# Altium PCB PCB.PcbDoc
Units mm, origin at the board's own origin, x right, y up, seen from the top; angles counter-clockwise.
Board outline 66 x 57 mm, 2 copper layers (Top Layer, Bottom Layer); 12 components, 12 nets, 64 pads, 4 vias.
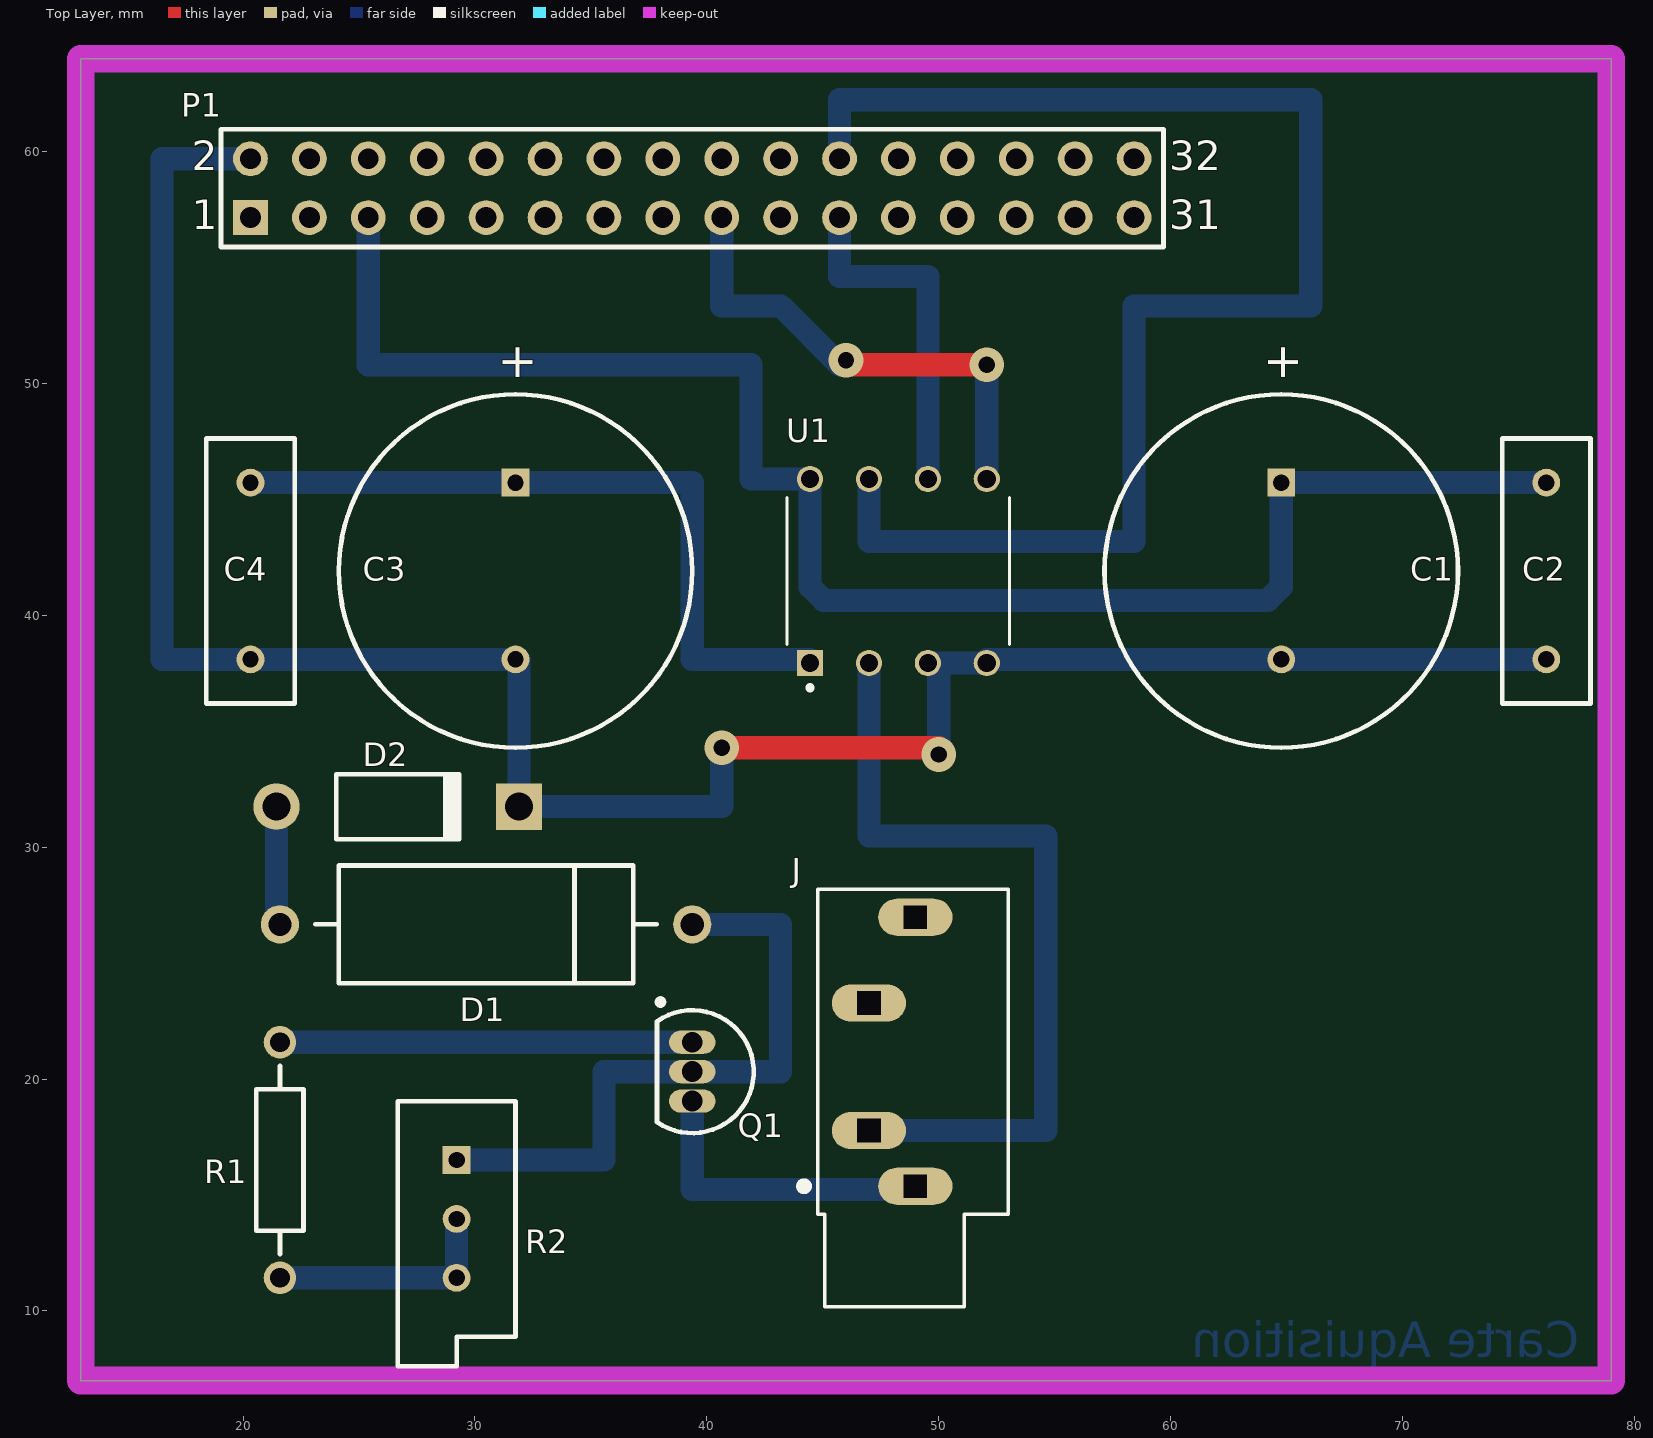
[diagram p0: Top Layer view]
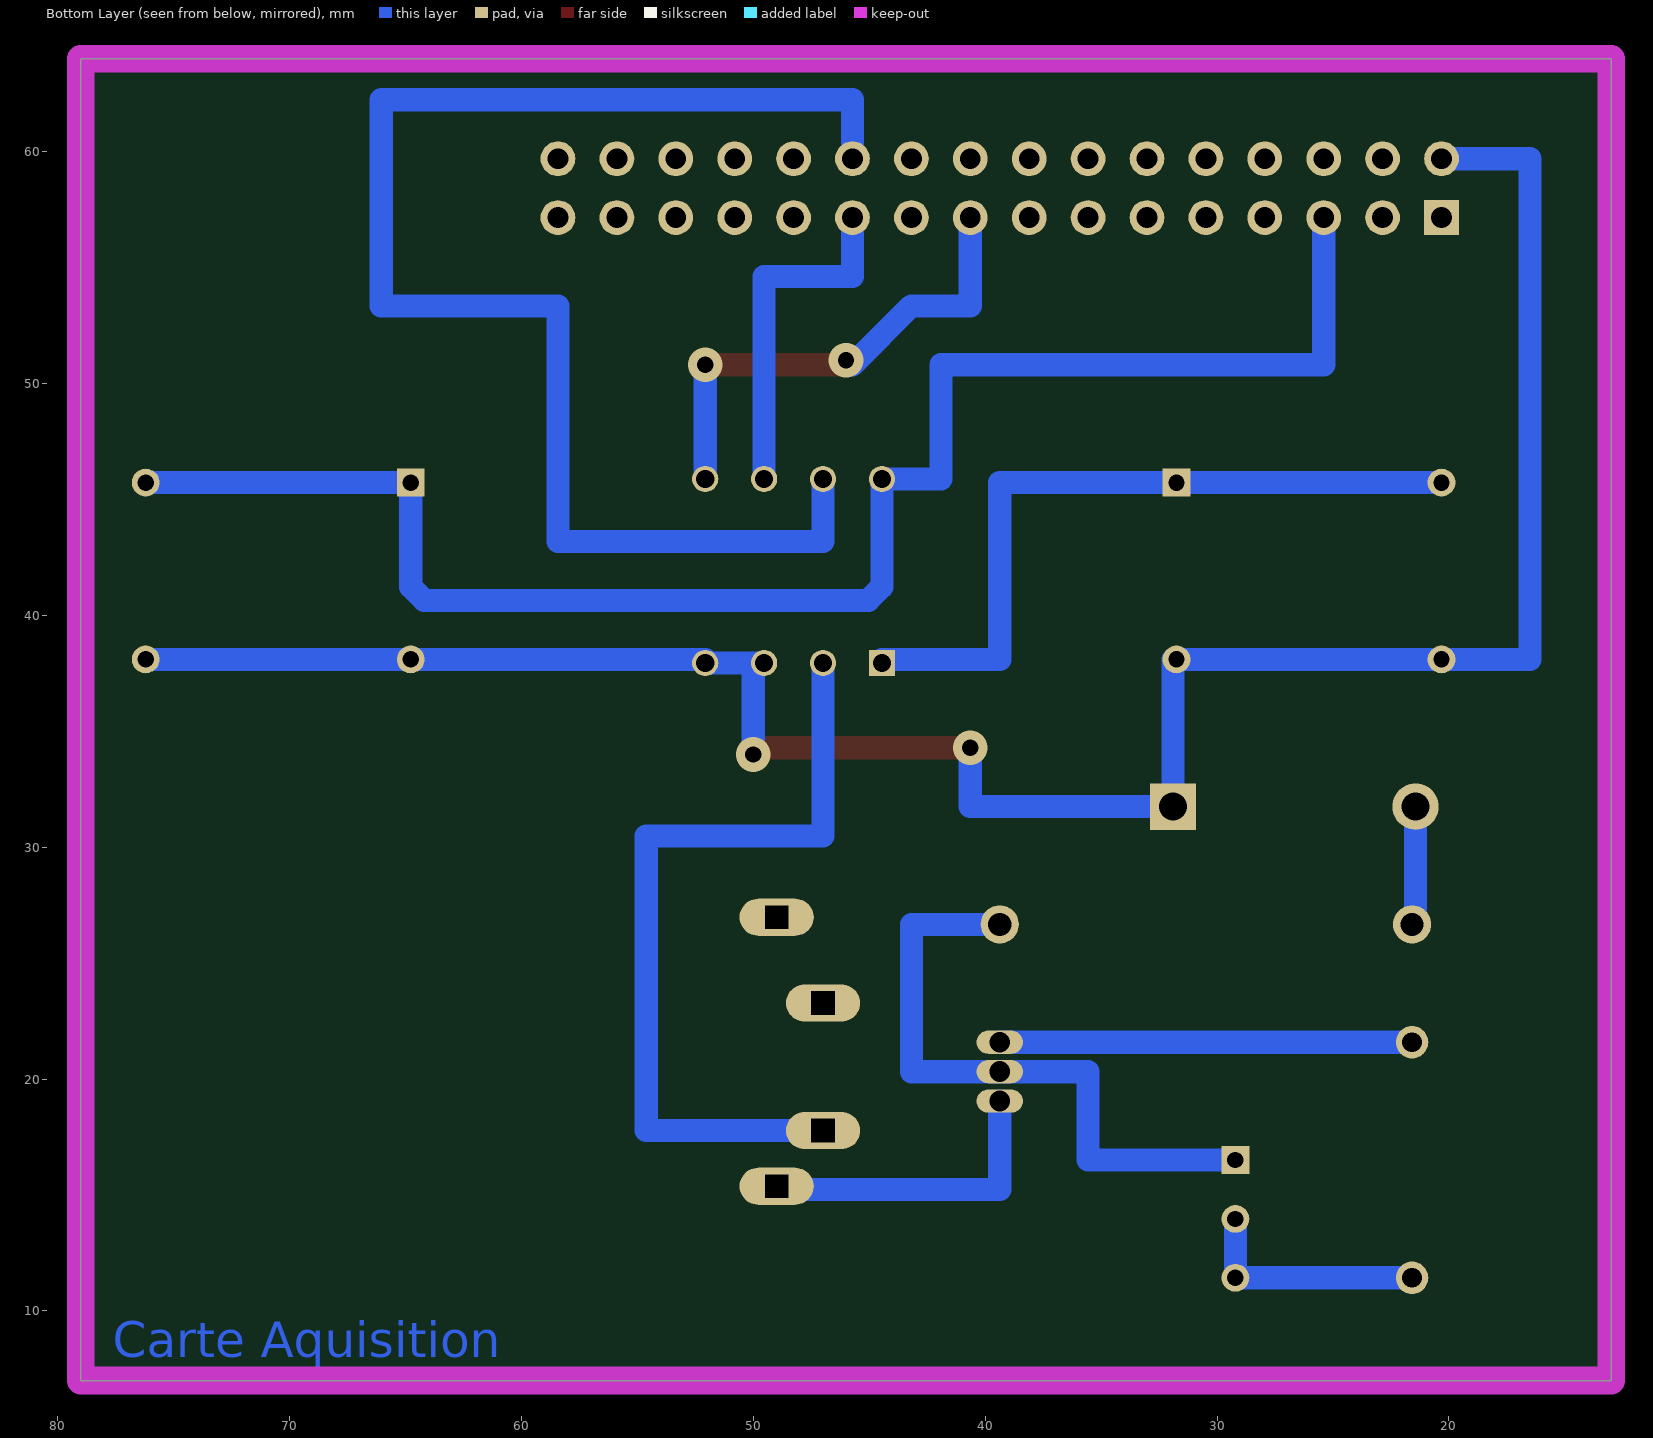
[diagram p1: Bottom Layer view, seen from below]

## Layer stack, top to bottom
Top Solder: solder mask 0.0102, Solder Resist, Dk 3.5
Top Layer: signal copper 0.0356
Dielectric 1: dielectric 0.32, FR-4, Dk 4.8
Bottom Layer: signal copper 0.0356
Bottom Solder: solder mask 0.0102, Solder Resist, Dk 3.5

## Board outline
79,64 79,7 13,7 13,64

## Design rules (kind name [scope] priority, off if disabled: settings)
Clearance [All] p1: gap=0.254 ignorepadtopadclearanceinfootprint=FALSE except(0: Arc-Hole Track-Hole SMDPad-Hole THPad-Hole Via-Hole Fill-Hole Poly-Hole Region-Hole Text-Hole)
PolygonConnect [All] p1: connectstyle=Relief reliefconductorwidth=0.254 reliefentries=4 polygonreliefangle="90 Angle" airgapwidth=0.254
RoutingVias [All] p1: holewidth=0.7 width=1.5 viastyle="Through Hole" minholewidth=0.381 minwidth=0.762 maxholewidth=0.711 maxwidth=1.5
SolderMaskExpansion [All] p1: expansion=0.102 istentingtop=FALSE
Width [All] p1: maxlimit=1.27 minlimit=0.254 preferedwidth=1
30 further rules are at their usual default settings.

## Components (designator, comment, footprint, x,y, rotation, side; value= is the part's Value field where it differs from the comment)
C1 "10µF" RB7.6-15 64.77,41.91 r90 top
C2 "Cap" RAD-0.3 76.2,41.91 r90 top value=0.1µF
C3 "Cap Pol1" RB7.6-15 31.75,41.91 r90 top value=2.2µF
C4 "Cap" RAD-0.3 20.32,41.91 r90 top value=0.1µF
D1 "D Zener" DIODE-0.7 30.48,26.67 r0 top
D2 "Diode 1N4001" DO-41 26.67,31.75 r0 top
J "SJ1-3534N" CUI_SJ1-3534N 48.99,15.38 r90 top
P1 "Header 16X2" HDR2X16 20.32,57.15 r0 top
Q1 "NPN" TO-226-AA 39.37,20.32 r180 top
R1 "Res2" AXIAL-0.4 21.59,16.51 r90 top value=100
R2 "RPot" VR5 29.21,13.97 r270 top value=1K
U1 "ADS7818P" DIP794W45P254L959H508Q8 48.26,41.91 r90 top

## Footprints (in the part's own frame and the unit in brackets; to place one, negate y for a bottom-side part, rotate by r counter-clockwise, add the part's x,y. Pads: shape width x height; smd on the part's side, far side on the other; paste and mask are expansions set on the pad)
AXIAL-0.4 [mm] "Axial Device, Thru-Hole; 2 Leads; 0.4 in Pin Spacing"
  round 1.4 hole 0.85: 1(-5.08,0) 2(5.08,0)
  silkscreen extent -4.06,-1.02 4.06,1.02, body extent -5.38,-1.2 5.38,1.2, height 2.36
CUI_SJ1-3534N [mm]
  oval 1.6x3.2 hole 1 square: 1(0,0) 2(2.4,2) 3(7.9,2) 4(11.6,0)
  silkscreen extent -5.2,-4 12.8,4.97, body extent -5.2,-4 12.8,4.2, height 11.65
DIODE-0.7 [mm] "Diode, Thru-Hole; 2 Leads; 0.7 in Pin Spacing"
  round 1.65 hole 1: 1(-8.89,0) 2(8.89,0)
  silkscreen extent -7.37,-2.54 7.37,2.54
DIP794W45P254L959H508Q8 [mm]
  rect 1.13x1.13 hole 0.78: 1(-3.97,3.81)
  round 1.13 hole 0.78: 2(-3.97,1.27) 3(-3.97,-1.27) 4(-3.97,-3.81) 5(3.97,-3.81) 6(3.97,-1.27) 7(3.97,1.27) 8(3.97,3.81)
  silkscreen extent -5.13,-4.79 3.18,4.79, body extent -3.91,-4.79 3.96,4.79, height 5.41
DO-41 [mm] "Diode, Axial; Body 5.2 x 2.7 mm (LxDia. max), Lead Dia. 0.86 mm (max)"
  round 2 hole 1.2: 1(-5.23,0)
  rect 2x2 hole 1.2: 2(5.23,0)
  silkscreen extent -2.65,-1.4 2.75,1.4
HDR2X16 [mm] "Connector; Header; 16x2 Position"
  rect 1.5x1.5 hole 0.9: 1(0,0)
  round 1.5 hole 0.9: 2(0,2.54) 3(2.54,0) 4(2.54,2.54) 5(5.08,0) 6(5.08,2.54) 7(7.62,0) 8(7.62,2.54) 9(10.16,0) 10(10.16,2.54) 11(12.7,0) 12(12.7,2.54) 13(15.24,0) 14(15.24,2.54) 15(17.78,0) 16(17.78,2.54) 17(20.32,0) 18(20.32,2.54) 19(22.86,0) 20(22.86,2.54) 21(25.4,0) 22(25.4,2.54) 23(27.94,0) 24(27.94,2.54) 25(30.48,0) 26(30.48,2.54) 27(33.02,0) 28(33.02,2.54) 29(35.56,0) 30(35.56,2.54) 31(38.1,0) 32(38.1,2.54)
  silkscreen extent -1.27,-1.27 39.37,3.81
RAD-0.3 [mm] "Radial Cap, Thru-Hole; 2 Leads; 0.3 in Pin Spacing"
  round 1.2 hole 0.7: 1(-3.81,0) 2(3.81,0)
  silkscreen extent -5.71,-1.91 5.71,1.91
RB7.6-15 [mm] "Polarized Capacitor (Radial); 2 Leads"
  rect 1.2x1.2 hole 0.7: 1(3.81,0)
  round 1.2 hole 0.7: 2(-3.81,0)
  silkscreen extent -7.62,-7.62 7.62,7.62
TO-226-AA [mm] "TO, Flat Index; 3 In-Line, Axial Leads; Body Dia. 4.8mm; Leads 0.55 x 0.51 mm (max)"
  oval 2x1 hole 0.9: 1(0,-1.27) 2(0,0) 3(0,1.27)
  silkscreen extent -2.65,-3.13 1.52,2.65, body extent -2.65,-2.66 1.52,2.66, height 5.33
VR5 [mm] "Thru-Hole; 3 Leads"
  rect 1.2x1.2 hole 0.7: 1(-2.54,0)
  round 1.2 hole 0.7: 2(0,0) 3(2.54,0)
  silkscreen extent -5.08,-2.54 6.35,2.54

## Part data
C1: library part "Cap Pol1", "Polarized Capacitor (Radial)", LatestRevisionDate=17-Jul-2002, LatestRevisionNote="Re-released for DXP Platform.", PackageDescription="Polarized Capacitor (Radial); 2 Leads", PackageReference=RB7.6-15, Published=8-Jun-2000, Publisher="Altium Limited"
C2 C4: "Capacitor", LatestRevisionDate=17-Jul-2002, LatestRevisionNote="Re-released for DXP Platform.", PackageDescription="Radial Cap, Thru-Hole; 2 Leads; 0.3 in Pin Spacing", PackageReference=RAD-0.3, Published=8-Jun-2000, Publisher="Altium Limited"
C3: "Polarized Capacitor (Radial)", LatestRevisionDate=17-Jul-2002, LatestRevisionNote="Re-released for DXP Platform.", PackageDescription="Polarized Capacitor (Radial); 2 Leads", PackageReference=RB7.6-15, Published=8-Jun-2000, Publisher="Altium Limited"
D1: "Zener Diode", LatestRevisionDate=17-Jul-2002, LatestRevisionNote="Re-released for DXP Platform.", PackageDescription="Diode, Thru-Hole; 2 Leads; 0.7 in Pin Spacing", PackageReference=DIODE-0.7, Published=8-Jun-2000, Publisher="Altium Limited"
D2: "1 Amp General Purpose Rectifier", Code_JEDEC=DO-204-AL, ComponentLink1Description="Manufacturer Link", ComponentLink1URL=http://www.fairchildsemi.com/, ComponentLink2Description=Datasheet, ComponentLink2URL=http://www.fairchildsemi.com/ds/1N%2F1N4001.pdf, DatasheetVersion=1998, LatestRevisionDate=17-Jul-2002, LatestRevisionNote="Re-released for DXP Platform.", PackageDescription="Diode, Axial; Body 5.2 x 2.7 mm (LxDia. max), Lead Dia. 0.86 mm (max)", PackageReference=DO-41, PackageVersion=Aug-1999, Published=8-Jun-2000, Publisher="Altium Limited"
J: "3,5 Ð¼Ð¼, ÑÑ‚ÐµÑ€ÐµÐ¾, Ð¿Ñ€ÑÐ¼Ð¾Ð¹ ÑƒÐ³Ð¾Ð», ÑÐºÐ²Ð¾Ð·Ð½Ð¾Ðµ Ð¾Ñ‚Ð²ÐµÑ€ÑÑ‚Ð¸Ðµ, Ð°ÑƒÐ´Ð¸Ð¾Ñ€Ð°Ð·ÑŠÐµÐ¼", Package=None, Availability=Unavailable, CUI_purchase_URL=https://www.cuidevices.com/product/interconnect/connectors/audio-connectors/jacks/sj1-353xn-series?utm_source=snapeda.com&utm_medium=referral&utm_campaign=snapedaBOM, MF="CUI Devices", MP=SJ1-3534N, Price=None, SnapEDA_Link=https://www.snapeda.com/parts/SJ1-3534N/CUI%20Devices/view-part/576149/?ref=snap
P1: "Header, 16-Pin, Dual row", LatestRevisionDate=17-Jul-2002, LatestRevisionNote="Re-released for DXP Platform.", Publisher="Altium Limited"
Q1: "NPN Bipolar Transistor", Code_JEDEC=TO-226-AA, LatestRevisionDate=17-Jul-2002, LatestRevisionNote="Re-released for DXP Platform.", PackageDescription="TO, Flat Index; 3 In-Line, Axial Leads; Body Dia. 4.8mm; Leads 0.55 x 0.51 mm (max)", PackageReference=TO-226-AA, Published=8-Jun-2000, Publisher="Altium Limited"
R1: "Resistor", PackageDescription="Axial Device, Thru-Hole; 2 Leads; 0.4 in Pin Spacing", PackageReference=AXIAL-0.4
R2: "Potentiometer", PackageDescription="Variable Resistor, Thru-Hole; 3 Leads", PackageReference=VR5
U1: Package=None, Availability=Unavailable, MP=ADS7818P, Price=None

## Via types
v1: diameter 1.5, hole 0.7, Top Layer to Bottom Layer, 4 vias

## Nets (pads, with @x,y where several pads share a name; then routed paths per layer and width w, separated by ;. In a path a pad name is that pad's centre, name@x,y a point inside that pad or via, vN(x,y) a via of type N, cw(c..) or ccw(c..) an arc to the next point about the centre after c; other vN are vias at no path point)
+5: C1.1 C2.2 P1.5 U1.8 | length 71.7
  Bottom Layer w1: P1.5 25.4,50.8 41.91,50.8 41.91,45.88 U1.8 44.45,41.226 45.036,40.64 64.184,40.64 64.77,41.226 C1.1 C2.2
GND: C1.2 C2.1 C3.2 C4.1 D2.2 P1.2 U1.3 U1.4 | length 98.8
  Top Layer w1: v1(40.64,34.29) 50,34.29 v1(50,34)
  Bottom Layer w1: P1.2 16.51,59.69 16.51,38.1 C4.1 C3.2 31.9,38.1 D2.2 40.64,31.75 v1(40.64,34.29) ; U1.3 U1.3@50,37.94 ; v1(50,34) U1.3@50,37.94 ; C2.1 C1.2 52.07,38.1 U1.4 U1.3@50,37.94
NetC3_1: C3.1 C4.2 U1.1 | length 31.9
  Bottom Layer w1: C4.2 C3.1 39.37,45.72 39.37,38.1 44.45,38.1 U1.1
NetD1_1: D1.1 D2.1 | length 5.5
  Top Layer w1.27: D2.1 D2.1@21.59,31.75
  Bottom Layer w1: D1.1 21.44,26.67 D2.1 D2.1@21.59,31.75
NetD1_2: D1.2 Q1.2 R2.1 | length 27.9
  Bottom Layer w1: R2.1 35.56,16.51 35.56,20.32 Q1.2 43.18,20.32 43.18,26.67 D1.2
NetJ_1: J.1 Q1.3 | length 13.6
  Bottom Layer w1: Q1.3 39.37,15.24 48.99,15.24 J.1
NetJ_2: J.2 U1.2 | length 35.5
  Bottom Layer w1: J.2@46.99,17.92 J.2 54.61,17.78 54.61,30.48 46.99,30.48 U1.2
NetP1_17: P1.17 U1.5 | length 21.1
  Top Layer w1: v1(46,51) 46,50.8 v1(52.07,50.8)
  Bottom Layer w1: P1.17 40.64,53.34 43.18,53.34 v1@45.72,50.8 ; U1.5 v1(52.07,50.8)
NetP1_21: P1.21 U1.6 | length 15.1
  Bottom Layer w1: P1.21 45.72,54.61 49.53,54.61 U1.6
NetP1_22: P1.22 U1.7 | length 63.7
  Top Layer w0.635: P1.22 P1.22@45.788,59.69
  Bottom Layer w1: P1.22 45.72,62.23 66.04,62.23 66.04,53.34 58.42,53.34 58.42,43.18 46.99,43.18 U1.7
NetQ1_1: Q1.1 R1.2 | length 17.8
  Bottom Layer w1: R1.2 Q1.1
NetR1_1: R1.1 R2.2 R2.3 | length 10.2
  Bottom Layer w1: R1.1 R2.3 R2.2
pads on no net: J.3 J.4 P1.1 P1.3 P1.4 P1.6 P1.7 P1.8 P1.9 P1.10 P1.11 P1.12 P1.13 P1.14 P1.15 P1.16 P1.18 P1.19 P1.20 P1.23 P1.24 P1.25 P1.26 P1.27 P1.28 P1.29 P1.30 P1.31 P1.32

## Keep-outs
Keep-Out Layer:
  the board outline again, w1.2

## Other copper
Bottom Layer:
  text "Carte Aquisition" at 77.63,8 h1.52

## Text inside footprints (layer, text, board x,y; h text height)
C1: Top Overlay "+" at 65.507,50.042 h1.5 r90
C3: Top Overlay "+" at 32.487,50.042 h1.5 r90
P1: Top Overlay "32" at 59.944,59.182 h1.27; Top Overlay "31" at 59.944,56.642 h1.27; Top Overlay "1" at 17.78,56.642 h1.27; Top Overlay "2" at 17.78,59.182 h1.27